# Altium PCB PCB2.PcbDoc
Units mm, origin at the board's own origin, x right, y up, seen from the top; angles counter-clockwise.
Board outline 50 x 40 mm, 2 copper layers (Top Layer, Bottom Layer); 24 components, 18 nets, 91 pads, 17 vias.
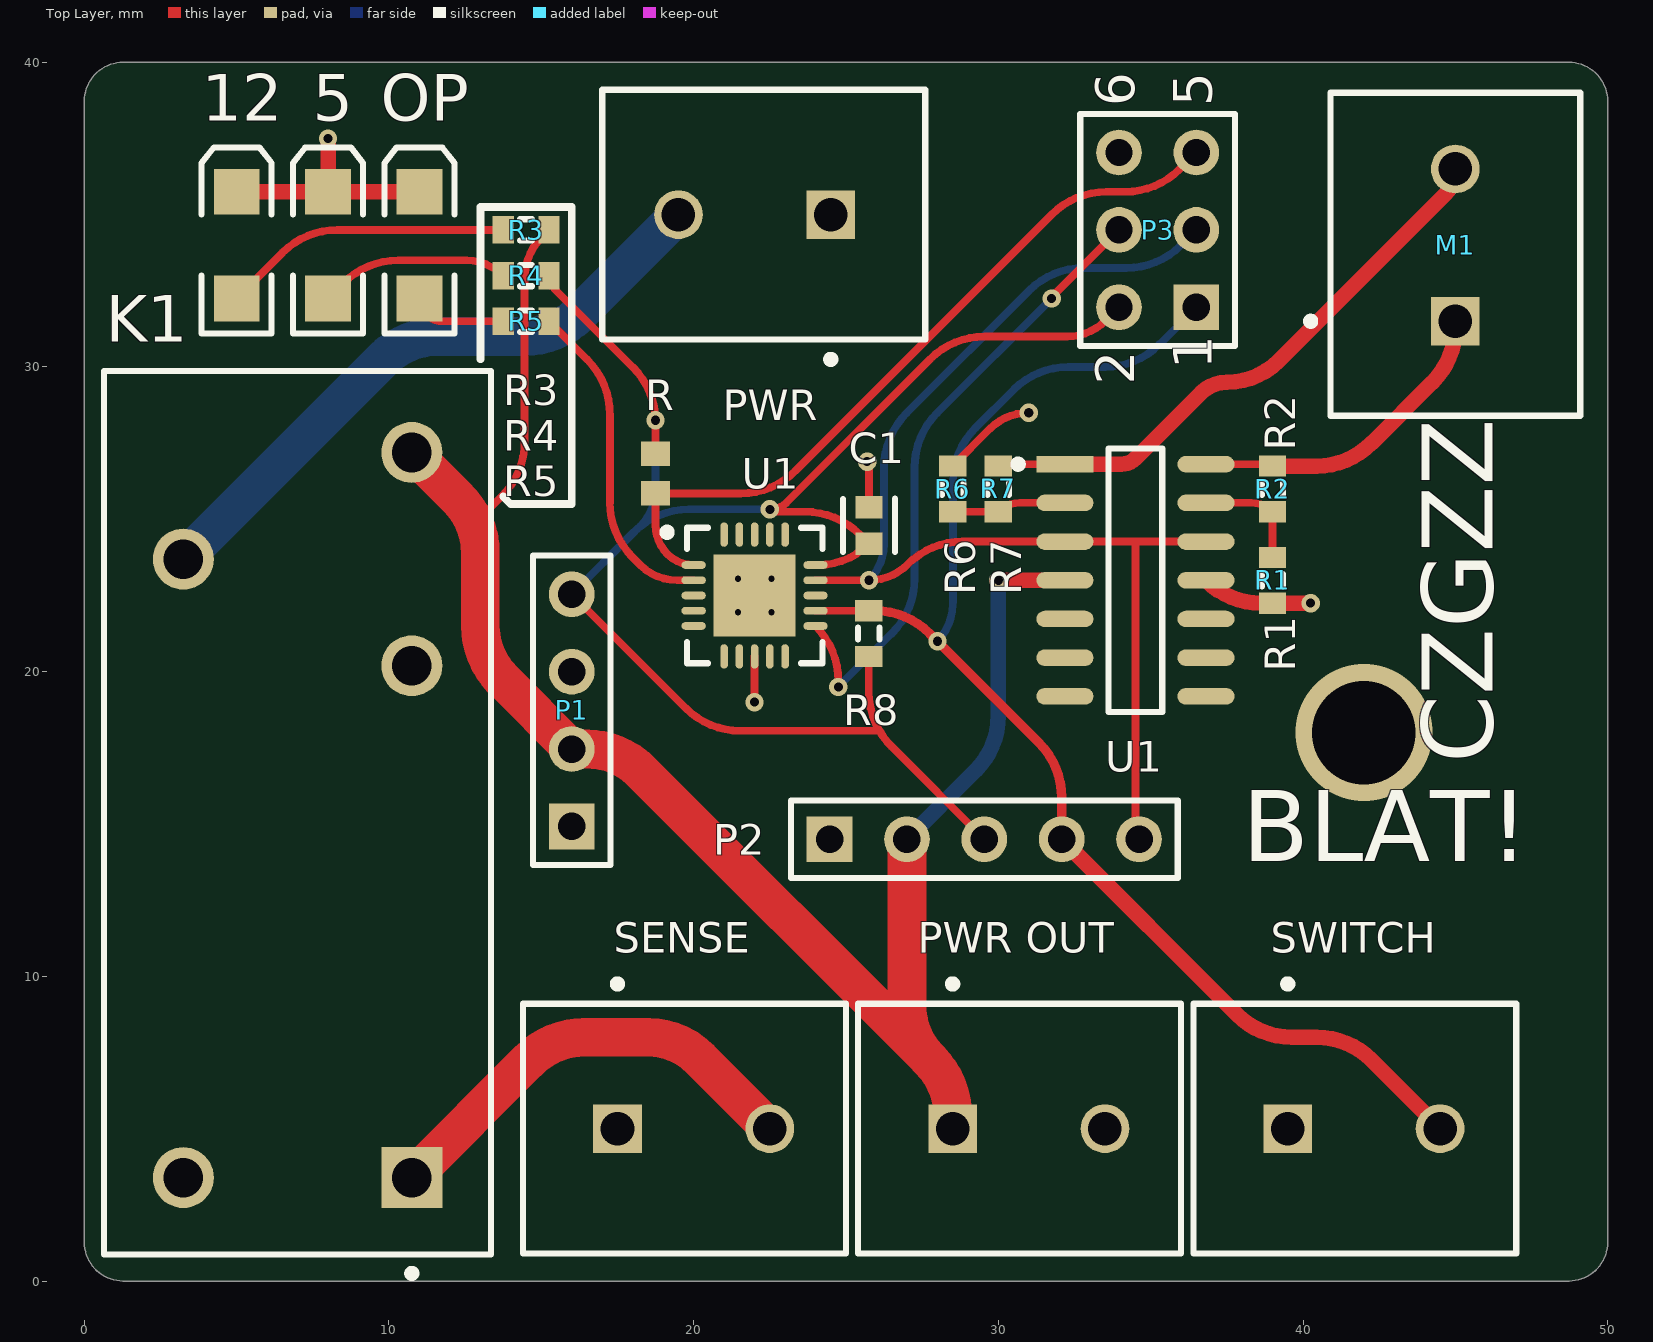
[diagram p0: Top Layer view]
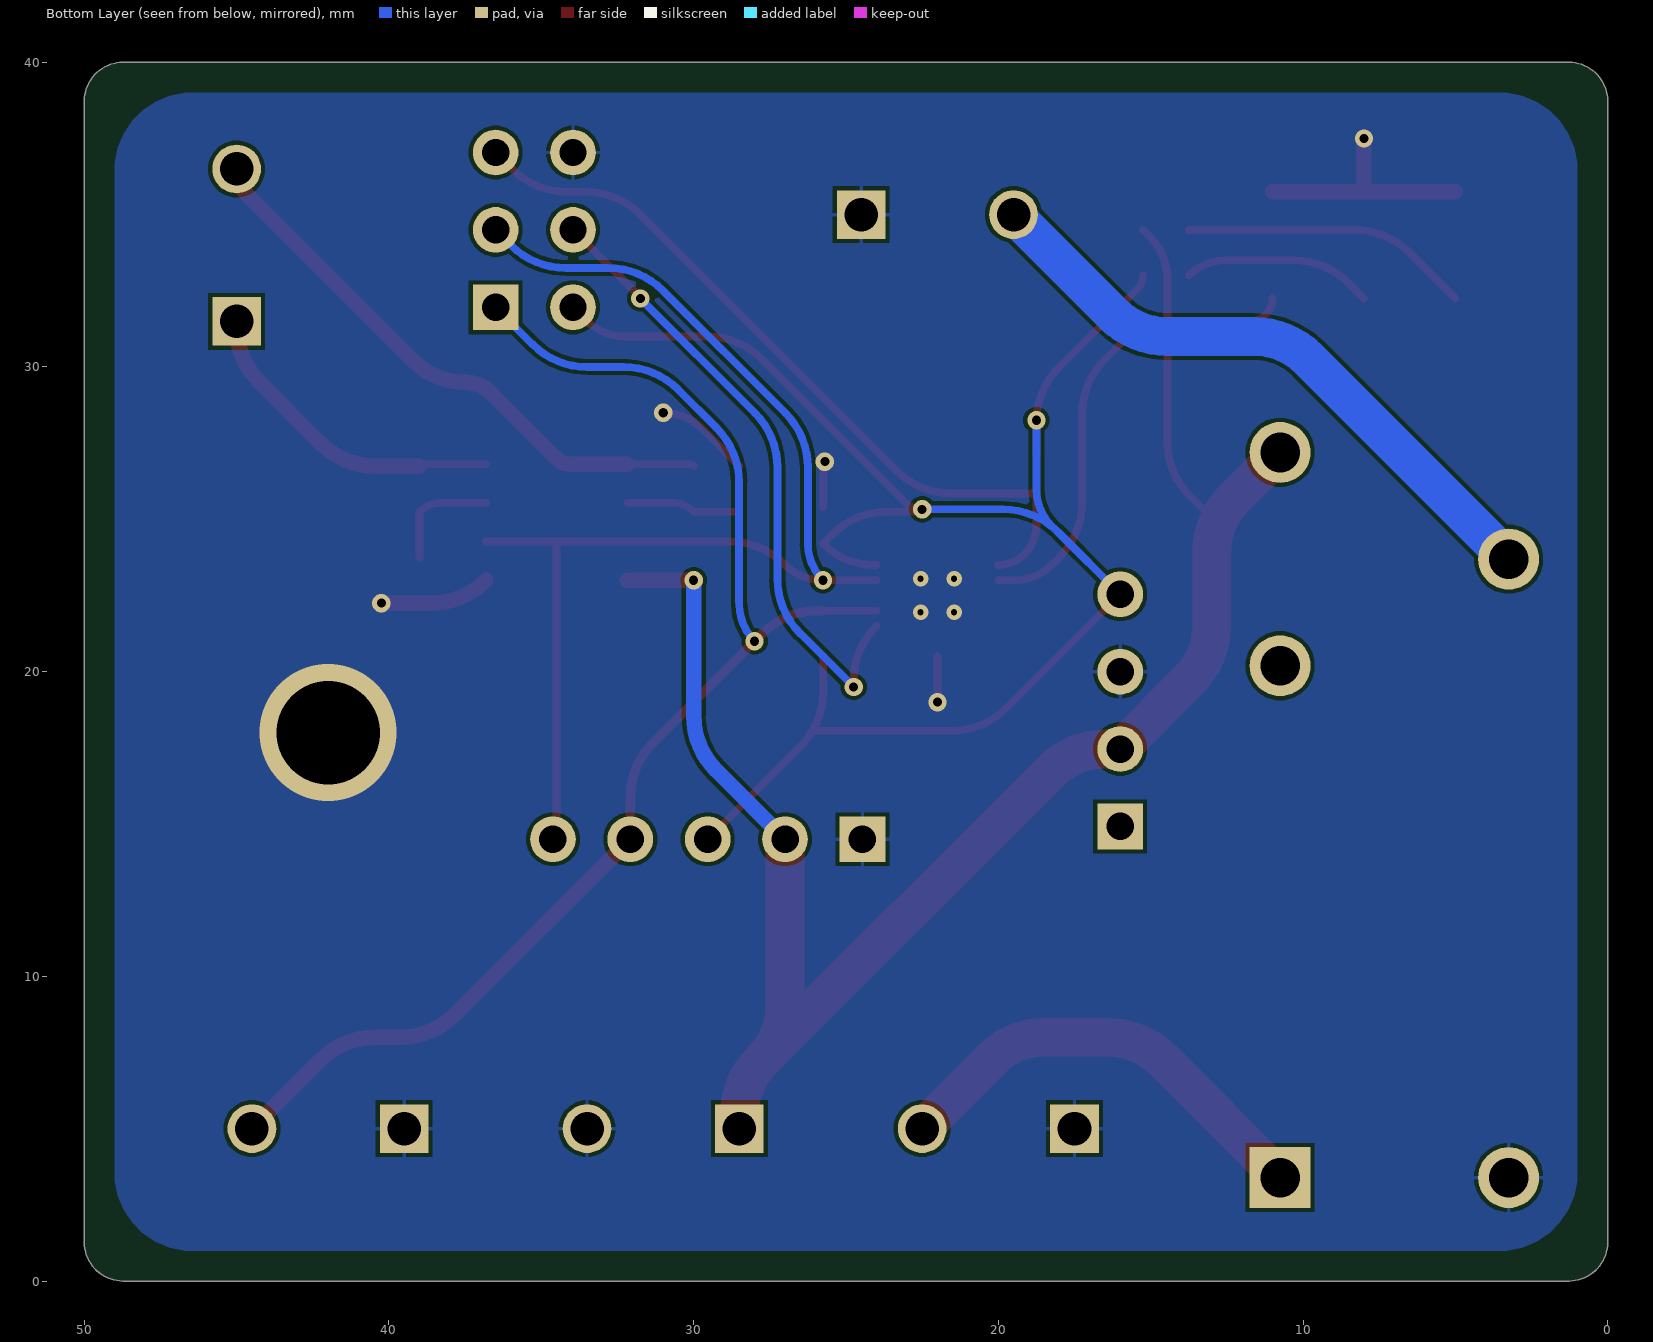
[diagram p1: Bottom Layer view, seen from below]

## Layer stack, top to bottom
Top Solder: solder mask 0.0102, Solder Resist, Dk 3.5
Top Layer: signal copper 0.0356
Dielectric 1: dielectric 0.32, FR-4, Dk 4.8
Bottom Layer: signal copper 0.0356
Bottom Solder: solder mask 0.0102, Solder Resist, Dk 3.5

## Board outline
1.27,0 cw(c1.27,1.27) 0,1.27 0,38.73 cw(c1.27,38.73) 1.27,40 48.73,40 cw(c48.73,38.73) 50,38.73 50,1.27 cw(c48.73,1.27) 48.73,0

## Design rules (kind name [scope] priority, off if disabled: settings)
BoardOutlineClearance [All] p1: gap=0.2 ignorepadtopadclearanceinfootprint=FALSE
Clearance [All] p1: gap=0.127 ignorepadtopadclearanceinfootprint=FALSE except(0.25: Arc-Hole Track-Hole SMDPad-Hole THPad-Hole Via-Hole Fill-Hole Poly-Hole Region-Hole Text-Hole)
ComponentClearance [All] p1: gap=0.127 collisioncheckmode=3 verticalgap=0.127 showdistances=TRUE
DiffPairsRouting [All] p1: maxlimit=0.254 minlimit=0.127 mostfreqgap=0.127 toplayer_minwidth=0.127 toplayer_maxwidth=25.4 toplayer_prefwidth=0.127 bottomlayer_minwidth=0.127 bottomlayer_maxwidth=25.4 bottomlayer_prefwidth=0.127 maxuncoupledlength=12.7
Height [All] p1: minheight=0 maxheight=1816.048 prefheight=12.7
HoleSize [All] p1: absolutevalues=TRUE maxlimit=6.3 minlimit=0.3 maxpercent=80.000 minpercent=20.000
HoleToHoleClearance [All] p1: gap=0.25 allowstackedmicrovias=FALSE
MinimumAnnularRing [All] p1: minimumring=0.076
MinimumSolderMaskSliver [All] p1: minsoldermaskwidth=0
PlaneClearance [All] p1: clearance=0.127
PlaneConnect PlaneConnectPowerPads [InPadClass('PowerPads')] p1: planeconnectstyle=Direct reliefexpansion=0.508 reliefentries=4 reliefconductorwidth=0.254 reliefairgap=0.254
PlaneConnect [All] p2: pad.planeconnectstyle=Relief pad.reliefexpansion=0.3 pad.reliefentries=4 pad.reliefconductorwidth=0.127 pad.reliefairgap=0.127 via.planeconnectstyle=Direct via.reliefexpansion=0.3 via.reliefentries=4 via.reliefconductorwidth=0.127 via.reliefairgap=0.127
PolygonConnect PolygonConnectPowerPads [All vs (InPadClass('PowerPads'))] p1: connectstyle=Direct reliefconductorwidth=0.254 reliefentries=4 polygonreliefangle="90 Angle" airgapwidth=0.254
PolygonConnect [All] p2: thpad.connectstyle=Relief thpad.reliefconductorwidth=0.127 thpad.reliefentries=4 thpad.polygonreliefangle="90 Angle" thpad.airgapwidth=0.127 smdpad.connectstyle=Relief smdpad.reliefconductorwidth=0.127 smdpad.reliefentries=4 smdpad.polygonreliefangle="90 Angle" smdpad.airgapwidth=0.127 via.connectstyle=Direct via.reliefconductorwidth=0.127 via.reliefentries=4 via.polygonreliefangle="90 Angle" via.airgapwidth=0.127
RoutingVias [All] p1: holewidth=0.3 width=0.6 viastyle="Through Hole" minholewidth=0.3 minwidth=0.6 maxholewidth=0.6 maxwidth=6.6
SilkToSilkClearance [All] p1: silktosilkclearance=0
SilkToSolderMaskClearance [IsPad] p1: minsilkscreentomaskgap=0.127 clearancetoexposedcopper=TRUE
SolderMaskExpansion [All] p1: expansion=0.075 istentingtop=FALSE
Width [All] p1: maxlimit=25.4 minlimit=0.127 preferedwidth=0.127 minimp=50.000000 maximp=50.000000 favimp=50.000000
20 further rules are at their usual default settings.

## Components (designator, comment, footprint, x,y, rotation, side; value= is the part's Value field where it differs from the comment)
5 "LED2" 3.2X1.6X1.1 8,34 r90 top (schematic designator D2)
12 "LED2" 3.2X1.6X1.1 5,34 r90 top (schematic designator D1)
C1 "C0603C104K5RACTU" FP-C0603C-CF-MFG 25.756,24.796 r90 top value="0.10 μF"
K1 "RT114012" FP-RT114012-MFG 7,15.375 r90 top
M1 "282836-2" TECO-282836-2_V 45,34 r90 top
OP "LED2" 3.2X1.6X1.1 11,34 r90 top (schematic designator D3)
P1 "Header 4" HDR1X4 16,14.92 r90 top
P2 "Header 5" HDR1X5 24.46,14.5 r0 top
P3 "Header 3X2" HDR2X3 36.5,31.96 r90 top
PWR "282836-2" TECO-282836-2_V 22,35 r180 top
"PWR OUT" "282836-2" TECO-282836-2_V 31,5 r0 top
R "CRCW060310K0FKEA" RESC1609X50X30NL8T20 18.75,26.5 r90 top (schematic designator R_RESET)
R1 "Res3" J1-0603 39,23 r90 top value=10K
R2 "Res3" J1-0603 39,26 r90 top value=10K
R3 "Res3" J1-0603 14.5,34.5 r0 top value=490
R4 "Res3" J1-0603 14.5,33 r0 top value=150
R5 "Res3" J1-0603 14.5,31.5 r0 top value=150
R6 "Res3" J1-0603 28.5,26 r270 top value=10K
R7 "Res3" J1-0603 30,26 r90 top value=10K
R8 "Res3" J1-0603 25.75,21.25 r270 top value=10K
SENSE "282836-2" TECO-282836-2_V 20,5 r0 top
SWITCH "282836-2" TECO-282836-2_V 42,5 r0 top
U1 "ATtiny85-20MU" 20M1_N 22,22.5 r0 top (schematic designator U2)
U1 "LM224DR" FP-D0014A-IPC_C 34.5,23 r0 top

## Footprints (in the part's own frame and the unit in brackets; to place one, negate y for a bottom-side part, rotate by r counter-clockwise, add the part's x,y. Pads: shape width x height; smd on the part's side, far side on the other; paste and mask are expansions set on the pad)
3.2X1.6X1.1 [mm] "SMT LED; 2 Flat Leads"
  rect 1.5x1.5 smd: 1(-1.75,0) 2(1.75,0)
  silkscreen extent -2.9,-1.15 3.2,1.15
20M1_N [mm] "QFN, 20-Leads, Body 4x4mm, Pitch 0.5mm, Thermal Pad 2.7x2.7mm, IPC Medium Density"
  oval 0.8x0.25 smd: 1(-2,1) 2(-2,0.5) 3(-2,0) 4(-2,-0.5) 5(-2,-1) 11(2,-1) 12(2,-0.5) 13(2,0) 14(2,0.5) 15(2,1)
  oval 0.25x0.8 smd: 6(-1,-2) 7(-0.5,-2) 8(0,-2) 9(0.5,-2) 10(1,-2) 16(1,2) 17(0.5,2) 18(0,2) 19(-0.5,2) 20(-1,2)
  rect 2.7x2.7 smd: 21(0,0)
  silkscreen extent -3,-2.22 2.23,2.23, body extent -2.07,-2.07 2.08,2.08, height 0.8
FP-C0603C-CF-MFG [mm]
  rect 0.75x0.9 smd paste+0 mask+0: 1(-0.6,0) 2(0.6,0)
  silkscreen extent -0.87,-0.85 0.88,0.85, body extent -1.2,-0.6 1.2,0.6, height 0.25
FP-D0014A-IPC_C [mm]
  rect 1.874x0.542 smd paste+0 mask+0: 1(-2.316,3.81)
  rrect100% 1.874x0.542 smd paste+0 mask+0: 2(-2.316,2.54) 3(-2.316,1.27) 4(-2.316,0) 5(-2.316,-1.27) 6(-2.316,-2.54) 7(-2.316,-3.81) 8(2.316,-3.81) 9(2.316,-2.54) 10(2.316,-1.27) 11(2.316,0) 12(2.316,1.27) 13(2.316,2.54) 14(2.316,3.81)
  silkscreen extent -3.97,-4.33 0.88,4.33, body extent -3.35,-4.43 3.35,4.43, height 0.25
FP-RT114012-MFG [mm]
  round 2 hole 1.3 paste-1000 mask+0: 11(8.32,3.75) 12(4.82,-3.75) 14(11.82,-3.75) A2(-11.98,3.75)
  rect 2x2 hole 1.3 paste-1000 mask+0: A1(-11.98,-3.75)
  silkscreen extent -15.25,-6.35 14.5,6.35, body extent -14.6,-6.45 14.6,6.45, height 0.25
HDR1X4 [mm] "Connector; Header; 4 Position"
  rect 1.5x1.5 hole 0.9: 1(0,0)
  round 1.5 hole 0.9: 2(2.54,0) 3(5.08,0) 4(7.62,0)
  silkscreen extent -1.27,-1.27 8.89,1.27
HDR1X5 [mm] "Connector; Header; 5 Position"
  rect 1.5x1.5 hole 0.9: 1(0,0)
  round 1.5 hole 0.9: 2(2.54,0) 3(5.08,0) 4(7.62,0) 5(10.16,0)
  silkscreen extent -1.27,-1.27 11.43,1.27
HDR2X3 [mm] "Connector; Header; 3x2 Position"
  rect 1.5x1.5 hole 0.9: 1(0,0)
  round 1.5 hole 0.9: 2(0,2.54) 3(2.54,0) 4(2.54,2.54) 5(5.08,0) 6(5.08,2.54)
  silkscreen extent -1.27,-1.27 6.35,3.81
J1-0603 [mm] "Chip Resistor, Body 1.6x0.8mm, IPC High Density"
  rect 0.7x0.9 smd: 1(-0.75,0) 2(0.75,0)
  silkscreen extent -0.2,-0.35 0.2,0.35, body extent -0.85,-0.48 0.85,0.48, height 0.9
RESC1609X50X30NL8T20 [mm] "Chip Resistor, 2-Leads, Body 1.65x0.95mm, IPC Medium Density"
  rect 0.8x0.95 smd: 1(-0.65,0) 2(0.65,0)
  body extent -0.82,-0.48 0.82,0.48, height 0.5
TECO-282836-2_V [mm] "Female Header, Pitch 5mm, 1 x 2 Position, Height 10mm"
  rect 1.6x1.6 hole 1.1: 1(-2.5,0)
  round 1.6 hole 1.1: 2(2.5,0)
  silkscreen extent -5.6,-4.1 5,4.87, body extent -5.6,-4.1 5,4.1, height 10

## Part data
5 12 OP: "Typical RED, GREEN, YELLOW, AMBER GaAs LED", LatestRevisionDate=17-Jul-2002, LatestRevisionNote="Re-released for DXP Platform.", PackageDescription="SM LED; 2 Flat Leads", PackageReference=3.2X1.6X1.1, PackageVersion=Feb-2002, Published=8-Jun-2000, Publisher="Altium Limited"
C1: library part CMP-2006-03061-2, "CAP CER 0.1UF 50V X7R 0603", Capacitance="0.10 μF", Manufacturer=KEMET, Package=C0603C-CF, Temperature="-55°C to +125°C", Temperature Characteristic=X7R, Temperature Coefficient=30ppm/°C, Temperature Range High=+125°C, Temperature Range Low=-55°C, Tolerance=0.1, Voltage Rating="50 V", Automotive=Yes, Automotive Grade="Grade 1", Category=Cap, ComponentLink2Description=Datasheet, ComponentLink2URL=https://api.kemet.com/component-edge/download/datasheet/C0603C100J5GACAUTO.pdf, Device Class L1="Passive Components", Device Class L2=Capacitors, Device Class L3="Ceramic Capacitors", Digikey Description="CAP CER 0.1UF 50V X7R 0603", Height=0.87mm, Lead Free=Yes, Manufacturer Part Number=C0603C104K5RACTU, Material=Ceramic, Octopart=https://octopart.com/c0603c104k5ractu-kemet-139244, RoHS=TRUE
K1: library part CMP-03395-000068-1, "RELAY GEN PURPOSE SPDT 12A 12V", Ambient Temperature Range High=+85°C, Ambient Temperature Range Low=-40°C, Coil Power=400mW, Coil Resistance=360Ω, Coil Voltage=12V, Current Rating=12A, Manufacturer="TE Connectivity", Automotive=No, Category=Relay, Coil Type=Non-Latching, ComponentLink2Description=Datasheet, ComponentLink2URL=https://www.te.com/commerce/DocumentDelivery/DDEController?Action=showdoc&DocId=Data+Sheet%7FRT1%7F0219%7Fpdf%7FEnglish%7FENG_DS_RT1_0219.pdf%7F1419108-1, Device Class L1=Electromechanical, Device Class L2=Relays, Device Class L3="Power Relays", Digikey Description="RELAY GEN PURPOSE SPDT 12A 12V", Height=15.7mm, Lead Free=Yes, Manufacturer Part Number=RT114012, Mouser Description="General Purpose Relays RT114012", Number Of Contacts=1, Octopart=https://octopart.com/rt114012-te+connectivity-39636422, Package=RT114012, RoHS=TRUE, Throw Configuration=SPDT
M1 PWR "PWR OUT" SENSE SWITCH: library part CMP-1684-00017-1, "Female Header, Pitch 5 mm, 1 x 2 Position, Height 10 mm, Tail Length 3.5 mm, Rohs, Bulk", Color=Green, Current=13.5A, Manufacturer="TE Connectivity", Package Description="Female Header, Pitch 5 mm, 1 x 2 Position, Height 10 mm, Tail Length 3.5 mm", Package Reference=THD, Standard Package=300, Voltage=300V, 3D Model=282836-2.pdf, Category=Connectors,Interconnects, Clamp Material - Plating=Brass-NickelPlated, Contact Material - Plating=Brass-TinPlated, Datasheet URL=http://www.te.com.cn/commerce/DocumentDelivery/DDEController?Action=showdoc&DocId=Catalog+Section%7F1308389_EUROSTYLE_TERMINAL_BLOCKS%7F0607%7Fpdf%7FEnglish%7FENG_CS_1308389_EUROSTYLE_TERMINAL_BLOCKS_0607.pdf%7F282836-2, Dynamic Catalog=BuchananSeries, Family=TerminalBlocks-WiretoBoard, Featured Product=EurostyleTerminalBlockConnectors, Features=Interlocking(Side), Housing Material=Polyamide(PA66),Nylon6/6, Manufacturer URL=http://www.te.com, Mating Orientation=HorizontalwithBoard, Mounting Type=ThroughHole, Number of Levels=1, Other Names="5ULV-02B / A98076", Packaging=Bulk, Pitch="0.197\"(5.00mm)", Positions Per Level=2, Product Training Modules=Wire-to-BoardEurostyleTerminalBlocks, RoHS Information=282836-2StatementofCompliance, Screw Material - Plating=Brass-NickelPlated, Screw Thread=M3, Series=Buchanan, Torque - Screw=0.68Nm(6Lb-In), Wire Gauge=16-30AWG, Wire Termination=Screw-RisingCageClamp
P1: "Header, 4-Pin", LatestRevisionDate=17-Jul-2002, LatestRevisionNote="Re-released for DXP Platform.", Publisher="Altium Limited"
P2: "Header, 5-Pin", LatestRevisionDate=17-Jul-2002, LatestRevisionNote="Re-released for DXP Platform.", Publisher="Altium Limited"
P3: "Header, 3-Pin, Dual row", LatestRevisionDate=17-Jul-2002, LatestRevisionNote="Re-released for DXP Platform.", Publisher="Altium Limited"
R: library part CMP-1666-00005-4, "Chip Resistor, 10 KOhm, +/- 1%, 100 mW, -55 to 155 degC, 0603 (1608 Metric), RoHS, Tape and Reel", Manufacturer="Vishay Semiconductor", Max Operating Temperature="155 degC", Min Operating Temperature="-55 degC", Package Quantity=5000, Voltage Rating="75 V", ComponentLink1Description="Manufacturer URL", ComponentLink1URL=http://www.vishay.com/, ComponentLink2Description=Datasheet, ComponentLink2URL=https://datasheet.ciiva.com/11809/0900766b80d98afc-11809037.pdf, DatasheetVersion=06/2012, Height="0.45 mm", Length="1.55 mm", Mounting Technology="Surface Mount", PackageDescription="2-Pin Surface Mount Device, Body 1.575 x 0.85 mm", PackageReference=0603, Packaging="Tape and Reel", REACH SVHC=Unknown, RoHSCompliant=true
R1 R2 R3 R4 R5 R6 R7 R8: "Resistor", LatestRevisionDate=29-May-2009, LatestRevisionNote="IPC-7351 Footprint Added.", PackageDescription="Chip Resistor", PackageReference=J1-0603, Published=8-Jun-2000, Publisher="Altium Limited"
U1: library part CMP-0093-00110-2, "8-bit AVR Microcontroller, 20MHz, 2.7-5.5V, 8K Flash, 512 Bytes EEPROM, 512 Bytes SRAM, Industrial Grade (-40°C to 85°C), 20-pad MLF, Pb-Free", Code_JEDEC=MO-220WGGD-5, ComponentLink1Description="Manufacturer URL", ComponentLink1URL=http://www.atmel.com/, ComponentLink2Description="ATtiny25/45/85 Datasheet", ComponentLink2URL=http://www.atmel.com/dyn/resources/prod_documents/doc2586.pdf, ComponentLink3Description="ATtiny25/45/85 Summary", ComponentLink3URL=http://www.atmel.com/dyn/resources/prod_documents/2586S.pdf, DatasheetVersion="revN, Apr-2011", PackageDescription="20-pad, 4 x 4 x 0.8 mm Body, Lead Pitch 0.50 mm, 2.6 mm Exposed Pad, Micro Lead Frame Package (MLF)", PackageReference=20M1, PackageVersion="revA, Oct-2004", RevisionNote="DatasheetVersion updated. URLs added."
U1: library part CMP-04895-000142-1, "IC OPAMP GP 4 CIRCUIT 14SOIC", Case/Package=SOIC, Dual Supply Voltage=9V, Input Bias Current=150nA, Input Offset Voltage (Vos)=5mV, Max Dual Supply Voltage=16V, Max Operating Temperature=85°C, Max Power Dissipation=1.26W, Max Supply Voltage=32V, Min Dual Supply Voltage=1.5V, Min Operating Temperature=-25°C, Min Supply Voltage=3V, Nominal Supply Current=10mA, Operating Supply Current=1.4mA, Output Current=30mA, Output Current per Channel=60mA, Package Quantity=1, Power Supply Rejection Ratio (PSRR)=65dB, Voltage Gain=100dB, Amplifier Type="GENERAL PURPOSE", Bandwidth=1.2MHz, Common Mode Rejection Ratio=70dB, Contact Plating=Gold, Gain Bandwidth Product=1.2MHz, Height=1.58mm, Lead Free="Lead Free", Length=8.65mm, Mount="Surface Mount", Number of Amplifiers=4, Number of Channels=4, Number of Circuits=4, Number of Elements=4, Number of Pins=14, Operating Supply Voltage=16V, Packaging="Tape and Reel", Radiation Hardening=No, REACH SVHC="No SVHC", RoHS Compliant=Yes, Series=-, Slew Rate=0.5V/µs, Supply Current=10mA, Technology=BIPOLAR, Unity Gain Bandwidth Product=1.2MHz, Width=3.91mm

## Via types
v1: diameter 0.6, hole 0.3, Top Layer to Bottom Layer, tented both sides, 12 vias
v2: diameter 0.5, hole 0.2, Top Layer to Bottom Layer, 4 vias
v3: diameter 4.5, hole 3.4, Top Layer to Bottom Layer, 1 vias

## Nets (pads, with @x,y where several pads share a name; then routed paths per layer and width w, separated by ;. In a path a pad name is that pad's centre, name@x,y a point inside that pad or via, vN(x,y) a via of type N, cw(c..) or ccw(c..) an arc to the next point about the centre after c; other vN are vias at no path point)
+5: C1.1 P1.4 P2.3 P3.2 R4.2 R8.2 R.2 U1.15 | length 57.3
  Top Layer w0.254: R4.2 ccw(c15.854,33) 15.427,32.573 18.006,29.994 cw(c16.21,28.198) v1@18.75,28.198 ; P1.4 19.738,18.802 ccw(c21.534,20.598) 21.534,18.058 26.099,18.058 ; R.2 v1@18.75,28.198 ; v1(18.75,28.25) v1@18.75,28.198 ; U1.15 24.076,23.5 ccw(c24.076,25.876) C1.1 25.446,24.506 ccw(c23.65,22.71) 23.65,25.25 22.5,25.25 v1(22.5,25.327) ccw(c22.5,26.116) 23.058,25.558 27.756,30.256 cw(c29.552,28.46) 29.552,31 32.25,31 ccw(c32.25,32.811) 33.53,31.53 P3.2 ; R8.2 25.75,19.342 ccw(c28.29,19.342) 26.099,18.058 ; P2.3 26.494,17.546 cw(c28.29,19.342) 26.099,18.058
  Bottom Layer w0.254: P1.4 18.043,24.583 cw(c19.839,22.787) 18.241,24.761 ; v1(18.75,28.25) 18.75,25.99 cw(c17.012,25.99) 18.241,24.761 ; v1(22.5,25.327) 19.839,25.327 ccw(c19.839,22.787) 18.241,24.761
+12: "PWR OUT.1" K1.14 P1.2 P2.2 R3.2 U1.4@32.184,23 | length 59.7
  Top Layer w0.254: 12.808,24.861 13.706,25.758 ccw(c11.91,27.554) 14.45,27.554 14.45,32.9 cw(c16.381,32.9) 15.016,34.266 R3.2
  Top Layer w0.508: v1(30,23) U1.4@32.184,23
  Top Layer w1.27: K1.14 12.256,25.689 cw(c10.46,23.893) 12.808,24.861 cw(c10.46,23.893) 13,23.893 13,21.512 ccw(c15.54,21.512) 13.744,19.716 P1.2 16.488,17.46 cw(c16.488,14.92) 18.284,16.716 27.744,7.256 ; P2.2 27,9.052 ccw(c29.54,9.052) 27.744,7.256 ; 28.5,5 28.5,5.448 ccw(c25.96,5.448) 27.756,7.244 27.744,7.256
  Bottom Layer w0.508: P2.2 29.256,16.756 ccw(c27.46,18.552) 30,18.552 v1(30,23)
GND: 5.2 12.2 "PWR OUT.2" C1.2 K1.A2 OP.2 P1.3 P2.1 P3.6 PWR.1 R1.1 R6.1 SENSE.1 SWITCH.1 U1.8@22,20.5 U1.11@36.816,23 U1.21 | length 17.5
  Top Layer w0.254: v1(22,19) U1.8@22,20.5 ; v1(25.693,26.893) cw(c25.541,26.741) 25.756,26.741 C1.2 ; R6.1 29.72,27.97 cw(c31,26.689) v1(31,28.5)
  Top Layer w0.508: 12.2 OP.2 ; 5.2 v1(8,37.5) ; U1.11@36.816,23 36.822,22.994 ccw(c38.618,24.79) 38.618,22.25 R1.1 v1(40.25,22.25)
  other v2: 21.45,21.95 22.55,21.95 21.45,23.05 22.55,23.05
  other v3: 42,18
IND_LED: R5.2 U1.2@20,23 | length 10.9
  Top Layer w0.254: R5.2 16.506,30.244 cw(c14.71,28.448) 17.25,28.448 17.25,25.552 ccw(c19.79,25.552) 17.994,23.756 18.25,23.5 ccw(c19.457,24.707) 19.457,23 U1.2@20,23
INPUT: P2.4 P3.1 R8.1 SWITCH.2 U1.12@24,22 | length 44.4
  Top Layer w0.254: U1.12@24,22 R8.1
  Top Layer w0.305: R8.1 25.948,22 cw(c25.948,19.46) 27.744,21.256 v1(28,21) 31.336,17.664 cw(c29.54,15.868) 32.08,15.868 P2.4
  Top Layer w0.508: P2.4 37.836,8.744 ccw(c39.632,10.54) 39.632,8 40.448,8 cw(c40.448,5.46) 42.244,7.256 SWITCH.2
  Bottom Layer w0.254: v1(28,21) ccw(c26.793,22.207) 28.5,22.207 ; 28.51,22.287 28.51,26.213 cw(c31.037,26.213) 29.25,28 30.506,29.256 cw(c32.302,27.46) 32.302,30 33.5,30 ccw(c33.5,32.511) 35.275,30.735 P3.1
NetD1_1: 12.1 R3.1 | length 9.6
  Top Layer w0.254: 12.1 6.506,33.756 cw(c8.302,31.96) 8.302,34.5 R3.1
NetD2_1: 5.1 R4.1 | length 6.3
  Top Layer w0.254: 5.1 8.506,32.756 cw(c10.302,30.96) 10.302,33.5 12.543,33.5 cw(c12.543,31.793) R4.1
NetD3_1: OP.1 R5.1 | length 3.2
  Top Layer w0.254: OP.1 ccw(c11.75,32.25) 11.75,31.5 R5.1
NetK1_11: K1.11 PWR.2 | length 20.7
  Bottom Layer w1.27: K1.11 9.811,30.256 cw(c11.607,28.46) 11.607,31 14.448,31 ccw(c14.448,33.54) 16.244,31.744 PWR.2
NetK1_A1: K1.A1 SENSE.2 | length 14.7
  Top Layer w1.27: K1.A1 14.611,7.256 cw(c16.407,5.46) 16.407,8 18.5,8 cw(c18.5,5.586) 20.207,7.293 SENSE.2
NetM1_1: M1.1 R2.2 U1.14@36.816,26.81 | length 10.7
  Top Layer w0.254: U1.14@36.816,26.81 38.855,26.81 cw(c38.855,26.605) R2.2
  Top Layer w0.508: R2.2 40.448,26.75 ccw(c40.448,29.29) 42.244,27.494 44.256,29.506 ccw(c42.46,31.302) 45,31.302 M1.1
NetM1_2: M1.2 R7.2 U1.1@32.184,26.81 | length 19.1
  Top Layer w0.254: R7.2 cw(c30.145,26.605) 30.145,26.81 U1.1@32.184,26.81
  Top Layer w0.508: U1.1@32.184,26.81 34.041,26.81 ccw(c34.041,27.459) 34.5,27 36.646,29.146 cw(c37.5,28.293) 37.5,29.5 ccw(c37.5,31.914) 39.207,30.207 44.646,35.646 ccw(c43.793,36.5) M1.2
NetP3_4: P3.4 U1.11@24,21.5 | length 20.8
  Top Layer w0.254: U1.11@24,21.5 24.006,21.494 cw(c22.21,19.698) 24.75,19.698 v1(24.75,19.5) ; v1(31.75,32.25) cw(c31.847,32.25) 31.778,32.318 P3.4
  Bottom Layer w0.254: v1(24.75,19.5) 26.506,21.256 ccw(c24.71,23.052) 27.25,23.052 27.25,26.698 cw(c29.79,26.698) 27.994,28.494 v1(31.75,32.25)
NetP3_5: P3.5 R.1 U1.1@20,23.5 | length 25.1
  Top Layer w0.254: U1.1@20,23.5 cw(c20,24.707) 19.146,23.854 cw(c20.104,24.811) 18.75,24.811 R.1 21.548,25.85 ccw(c21.548,28.39) 23.344,26.594 31.756,35.006 cw(c33.552,33.21) 33.552,35.75 34.158,35.75 ccw(c34.158,38.29) 35.954,36.494 P3.5
NetR1_2: R1.2 R2.1 U1.13@36.816,25.54 | length 3.8
  Top Layer w0.254: U1.13@36.816,25.54 38.3,25.54 cw(c38.3,24.55) R2.1 R1.2
NetR6_2: R6.2 R7.1 U1.2@32.184,25.54 | length 3.8
  Top Layer w0.254: R6.2 R7.1 cw(c30.7,24.55) 30.7,25.54 U1.2@32.184,25.54
OUTPUT: P2.5 P3.3 U1.3@32.184,24.27 U1.12@36.816,24.27 U1.14@24,23 | length 40.6
  Top Layer w0.254: U1.14@24,23 v1(25.756,23) ccw(c25.756,24.796) 27.026,23.526 cw(c28.822,21.73) 28.822,24.27 32.184,24.27 34.5,24.27 ; P2.5 cw(c34.91,14.79) 34.5,14.79 34.5,24.27 ; U1.12@36.816,24.27 34.5,24.27
  Bottom Layer w0.254: v1(25.756,23) ccw(c24.564,24.192) 26.25,24.192 26.25,26.698 cw(c28.79,26.698) 26.994,28.494 31.006,32.506 cw(c32.802,30.71) 32.802,33.25 34.198,33.25 ccw(c34.198,35.79) 35.994,33.994 P3.3
SHDN: P1.1
pads on no net: K1.12 U1.3@20,22.5 U1.4@20,22 U1.5 U1.6 U1.7 U1.8@36.816,19.19 U1.9 U1.10 U1.13@24,22.5 U1.16 U1.17 U1.18 U1.19 U1.20

## Polygon pours and split planes (outlines as drawn)
GND on Bottom Layer "NONET_L01_P-001" (solid, remove dead copper, pour order 1): 46.46,1 ccw(c46.46,3.54) 49,3.54 49,36.46 ccw(c46.46,36.46) 46.46,39 3.54,39 ccw(c3.54,36.46) 1,36.46 1,3.54 ccw(c3.54,3.54) 3.54,1 5,1

## Silkscreen, mask and mechanical layers (free items; w line width, h text height)
Top Overlay:
  lines w0.254: 13,30.25 13,35.25 16,35.25 16,30.75 16,25.5 14,25.5 13.75,25.75
  text "R2" at 39.75,27.25 h1 r90
  text "R3 / R4 / R5" at 13.75,25.75 h1
  text "R6" at 29.25,22.5 h1 r90
  text "R7" at 30.75,22.5 h1 r90
  text "R1" at 39.75,20 h1 r90
  text "CZGZZ" at 47,17 h4 r90
  text "BLAT!" at 38,13 h4
Mechanical 1:
  lines w0.254: 0,1.27 ccw(c1.27,1.27) 1.27,0 38.73,0 48.73,0 ccw(c48.73,1.27) 50,1.27 50,38.73 ccw(c48.73,38.73) 48.73,40 38.73,40 1.27,40 ccw(c1.27,38.73) 0,38.73 0,1.27

## Text inside footprints (layer, text, board x,y; h text height)
P3: Top Overlay "6" at 34.468,38.564 h1.27 r90; Top Overlay "5" at 37.008,38.564 h1.27 r90; Top Overlay "2" at 34.468,29.42 h1.27 r90; Top Overlay "1" at 37.008,29.928 h1.27 r90